# EAGLE board Stratologger sl100 Board (EAGLE 8.1.0)
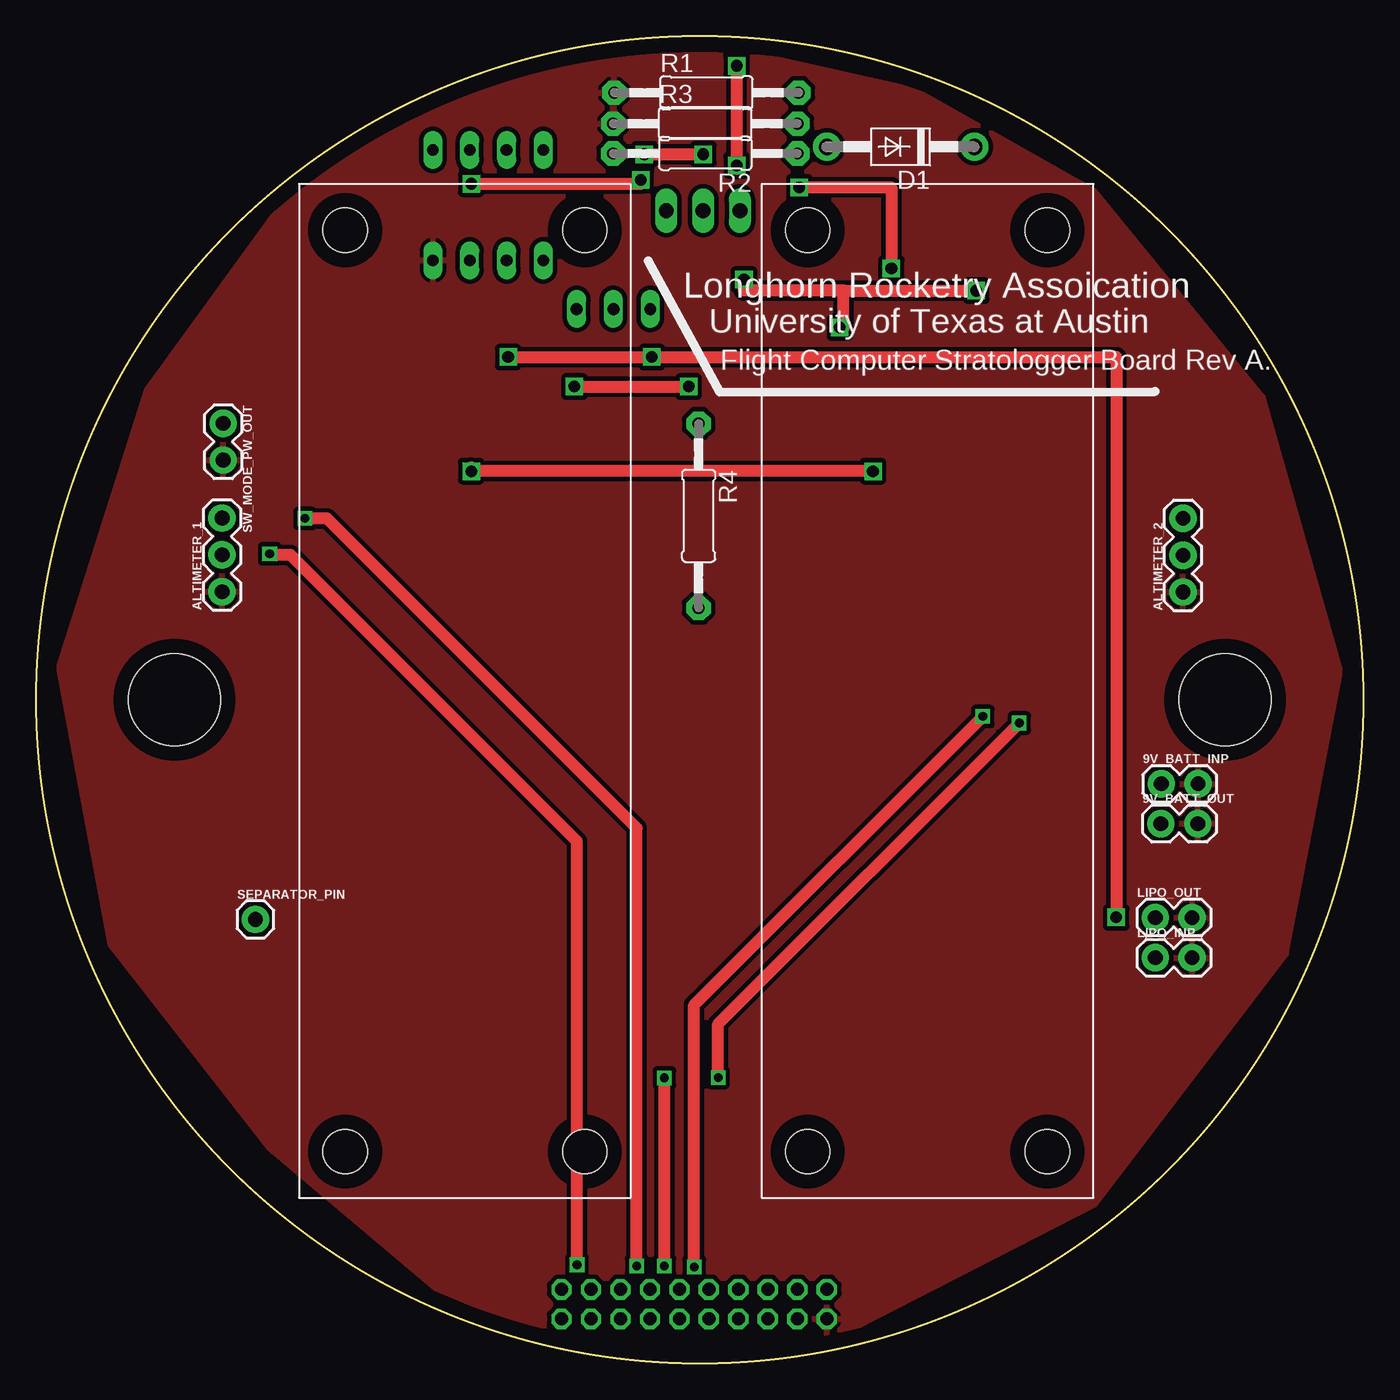
[diagram p0: board, top side]
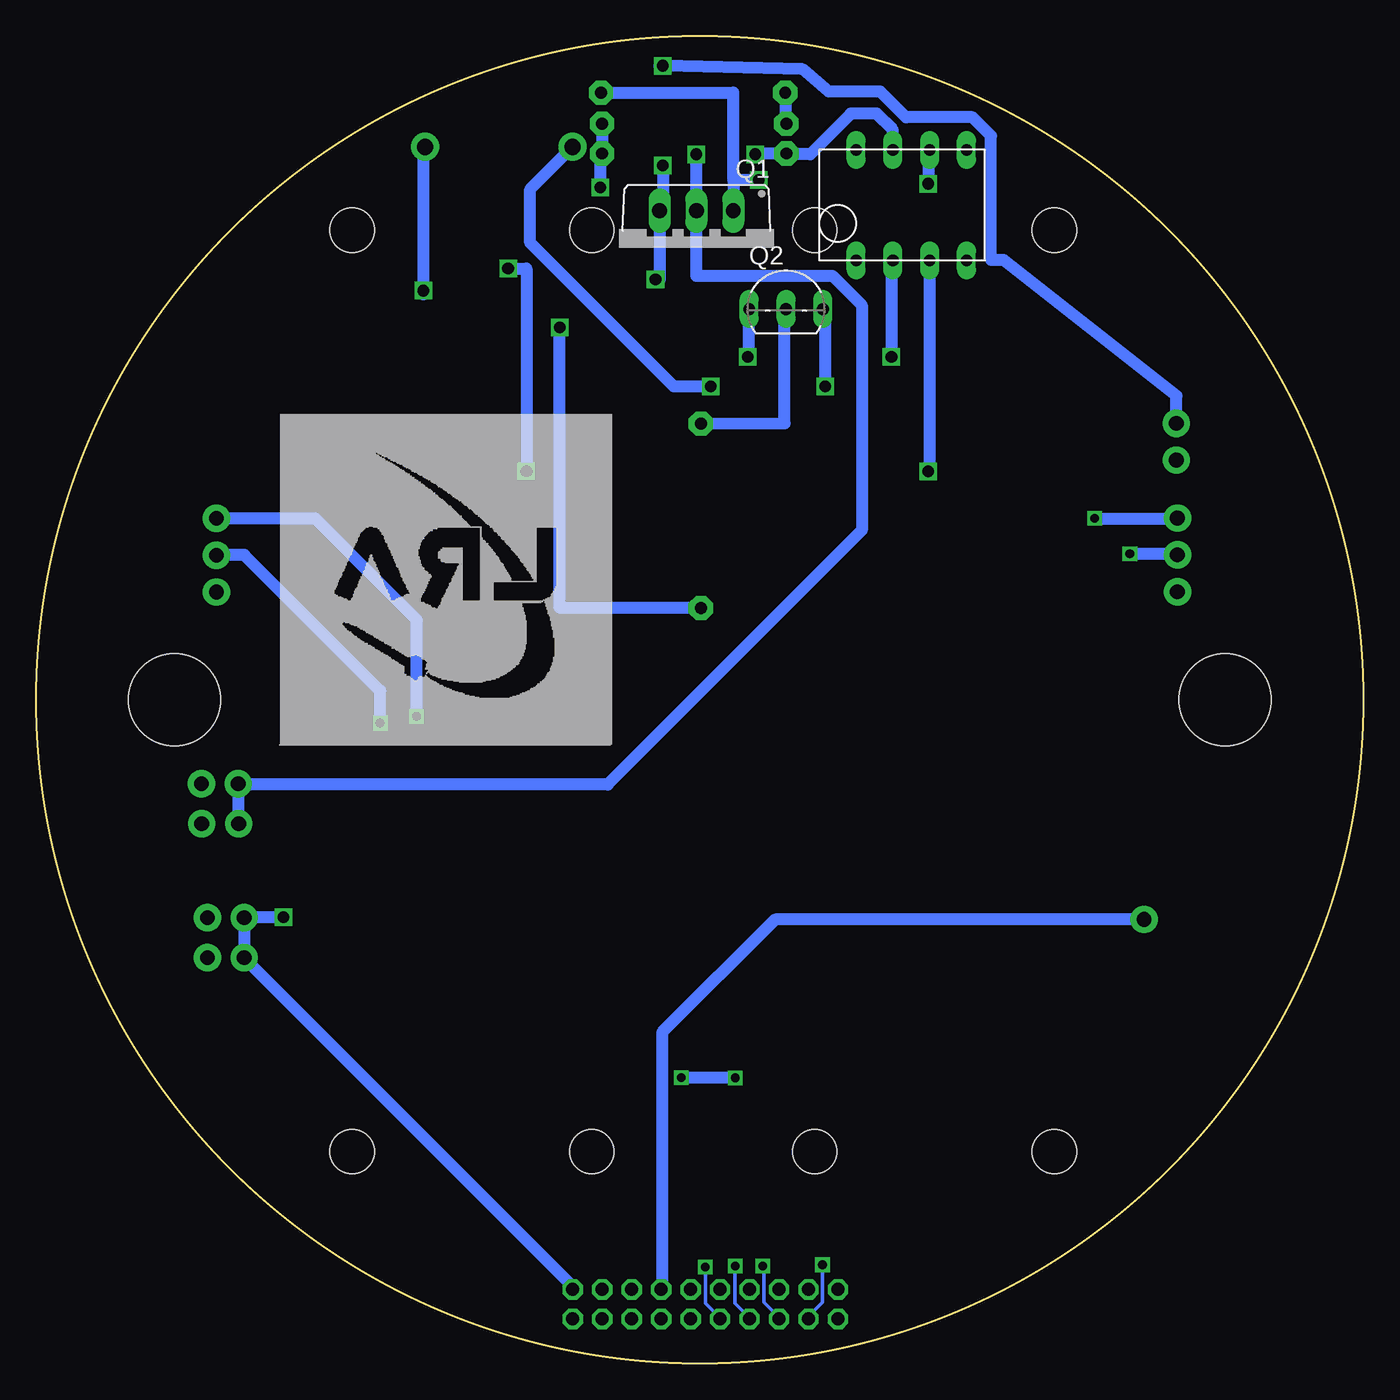
[diagram p1: board, bottom side, seen from below]

Size 91.44 x 91.44 mm. Coordinates in mm from the lower left corner, seen from the top.
Outline: circle at 45.72,45.72 radius 45.72
Copper layers (1*16): Top 0.035mm / dielectric 1.5mm / Bottom 0.035mm
Design rules "default *": minimum track width 0.15mm, minimum drill 0.35mm, track to track 12mil, track to pad 6mil, pad to pad 6mil, via to via 6mil, smd to smd 6mil, copper to edge 40mil, drill to drill 6mil, minimum pad ring 10mil, minimum via ring 8mil, stop-mask expansion 4mil, vias tented up to drill 0mil, thermal gap 10mil
Holes 6.35 mm at 9.53,45.72 81.92,45.72

## Footprints (pad centres in the part's own frame; a part is rotated, then mirrored left to right if it is on the bottom)
1X02 = drill 1.016 pad 1.88: 1 0,0; 2 2.54,0
1X03 = drill 1.016 pad 1.88: 1 0,0; 2 2.54,0; 3 5.08,0
DO41-10 = drill 1.118 pad 1.93: A 5.08,0; C -5.08,0
TO220BV = drill 1.016 long: D 0,-2.54; G -2.54,-2.54; S 2.54,-2.54
TO92-EBC-OVAL = drill 0.813 long: B 0,-1.27; C 2.54,-1.27; E -2.54,-1.27
0207/12 = drill 0.813 pad 1.676 octagon: 1 -6.35,0; 2 6.35,0
1X01 = drill 1.016 pad 1.88: 1 0,0
LM741 = drill 0.8 long: LN+ 0,2.54; LN- 0,5.08; NC 7.62,7.62; OFFSET1 0,7.62; OFFSET2 7.62,0; OUT 7.62,2.54; VCC+ 7.62,5.08; VCC- 0,0
STRATOLOGGER = hole 3.048: -3.175,3.175; -3.175,19.685; -66.675,19.685; -66.675,3.175
SMALLHEADERPACKAGE = drill 0.9 octagon: P$1 0,0; P$2 0,2.032; P$3 0,4.064; P$4 0,6.096; P$5 0,8.128; P$6 2.032,0; P$7 2.032,2.032; P$8 2.032,4.064; P$9 2.032,6.096; P$10 2.032,8.128; P$11 2.032,10.16; P$12 0,10.16; P$13 0,12.192; P$14 2.032,12.192; P$15 0,14.224; P$16 2.032,14.224; P$17 2.032,16.256; P$18 0,16.256; P$19 0,18.288; P$20 2.032,18.288

## Placement (x,y rotation side)
9V_BATT_INP  [1X02]  77.52,39.93 0 top
9V_BATT_OUT  [1X02]  77.5,37.19 0 top
ALTIMETER_1  [1X03]  12.8,53.16 90 top
ALTIMETER_2  [1X03]  79.02,53.14 90 top
D1  1N4004  [DO41-10]  59.56,83.82 180 top
LIPO_INP  [1X02]  77.11,27.94 0 top
LIPO_OUT  [1X02]  77.11,30.71 0 top
Q1  BUZ11BV  [TO220BV]  45.95,76.89 180 bottom
Q2  2N2907  [TO92-EBC-OVAL]  39.78,73.91 0 bottom
R1  10k  [0207/12]  46.18,87.55 0 top
R2  100  [0207/12]  46.1,83.36 180 top
R3  125  [0207/12]  46.1,85.42 0 top
R4  1k  [0207/12]  45.64,58.39 270 top
SEPARATOR_PIN  [1X01]  15.1,30.58 0 top
SW_MODE_PW_OUT  [1X02]  12.88,64.77 270 top
U$1  LM471  [LM741]  27.33,76 90 bottom
U$2  STRATOLOGGER  [STRATOLOGGER]  18.11,11.4 270 top
U$3  SMALLHEADERPACKAGE  [SMALLHEADERPACKAGE]  36.2,5.08 270 top
U$4  STRATOLOGGER  [STRATOLOGGER]  49.99,11.4 270 top

## Library data of the parts
9V_BATT_INP 9V_BATT_OUT ALTIMETER_1 ALTIMETER_2 LIPO_INP LIPO_OUT SEPARATOR_PIN SW_MODE_PW_OUT = SparkFun-Connectors
D1 Q2 R1-R4 = adafruit
Q1 = transistor-power
U$1 = LM741
U$2 U$4 = LRA_FlightCPU_Components
U$3 = LRA_FlightCPU_Connector

## Nets
5V_DIV: R2.1 R3.2 U$1.LN+
9V: 9V_BATT_INP.1 9V_BATT_OUT.1 Q1.D R2.2 U$1.VCC+
D1: SEPARATOR_PIN.1 U$3.P$13
GND: 9V_BATT_INP.2 9V_BATT_OUT.2 ALTIMETER_1.1 ALTIMETER_2.1 LIPO_INP.2 LIPO_OUT.2 R1.1 R3.1 SW_MODE_PW_OUT.2 U$1.VCC- U$3.P$20
LIPO_BATT: LIPO_INP.1 LIPO_OUT.1 Q2.E U$1.LN- U$3.P$19
N$1: Q2.B R4.1
N$2: D1.A Q2.C
N$5: Q1.G R1.2 U$1.OUT
N$7: D1.C Q1.S R4.2 SW_MODE_PW_OUT.1
RX1: ALTIMETER_1.2 U$3.P$7
RX2: ALTIMETER_2.2 U$3.P$9
TX1: ALTIMETER_1.3 U$3.P$8
TX2: ALTIMETER_2.3 U$3.P$10

## Tracks (layer width: path | path; a pad name or v marks a point on that pad's centre or on a via)
5V_DIV  (via drill 0.8)
  Top 0.813: v52.58,81.03 58.93,81.03 v58.93,75.44 | v57.66,61.47 v29.97,61.47 | v29.97,61.47 29.97,61.72 v29.97,61.47
  Bottom 0.813: R3.2 R2.1 52.58,83.36 v52.58,81.03 | v58.93,75.44 57.66,75.44 v57.66,61.47 | v29.97,61.47 29.87,61.47 U$1.LN+
9V  (via drill 0.8)
  Top 0.813: v41.91,83.31 v45.97,83.31
  Bottom 0.813: U$1.VCC+ 32.41,84.99 33.53,86.11 35.31,86.11 38.1,83.31 39.7,83.31 R2.2 41.6,83.36 41.66,83.31 v41.91,83.31 | v45.97,83.31 45.97,79.45 Q1.D 45.97,79.43 45.97,74.93 36.58,74.93 34.54,72.9 34.54,57.4 52.07,39.88 77.47,39.88 9V_BATT_INP.1 77.52,37.21 9V_BATT_OUT.1
D1
  Bottom 0.813: SEPARATOR_PIN.1 40.51,30.58 48.31,22.78 48.31,5.16 U$3.P$13
GND
  Bottom 0.813: R1.1 39.83,85.5 R3.1
  pour Top: 45.47,1.27 55.12,1.78 72.9,10.92 86.11,28.19 89.87,47.7 84.53,66.55 72.9,80.77 60.66,87.68 46.23,90.93 30.99,88.65 17.78,81.03 7.62,67.06 1.55,47.96 5.11,28.85 16.05,14.86 27.48,5.21 36.32,1.52
LIPO_BATT  (via drill 0.8)
  Top 0.813: v32.51,69.34 v42.42,69.34 74.42,69.34 v74.42,30.73
  Bottom 0.813: U$3.P$19 54.48,5.31 LIPO_INP.1 LIPO_OUT.1 77.11,30.73 v74.42,30.73 | U$1.LN- 32.51,76 v32.51,69.34 | v42.42,69.34 42.32,69.34 Q2.E
N$1
  Bottom 0.813: R4.1 45.24,64.75 39.88,64.77 39.88,72.54 Q2.B
N$2  (via drill 0.8)
  Top 0.813: v37.08,67.31 v44.96,67.31
  Bottom 0.813: Q2.C 37.08,72.64 v37.08,67.31 | v44.96,67.31 47.5,67.31 57.4,77.22 57.4,80.9 D1.A
N$5  (via drill 0.8)
  Top 0.813: v29.97,81.28 41.66,81.28 v41.66,81.53
  Bottom 0.813: R1.2 43.41,87.55 43.41,81.53 | 43.41,81.53 Q1.G | U$1.OUT 29.97,83.62 v29.97,81.28 | v41.66,81.53 43.41,81.53
N$7  (via drill 0.8)
  Top 0.813: 55.63,73.91 v64.77,73.91 | 55.63,73.91 48.77,73.91 v48.77,74.68 | v55.37,71.37 55.63,71.37 55.63,73.91 | v48.26,89.41 v48.26,82.55 48.26,82.3
  Bottom 0.813: SW_MODE_PW_OUT.1 12.88,66.67 24.77,76.02 25.65,76.02 25.65,84.58 26.92,85.85 31.5,85.85 33.27,87.63 36.83,87.63 38.61,89.15 v48.26,89.41 48.51,89.41 | D1.C 64.77,83.82 v64.77,73.91 64.77,73.66 | v48.77,74.68 48.49,74.68 Q1.S 48.26,79.65 v48.26,82.55 | R4.2 55.37,52.05 v55.37,71.37
RX1  (via drill 0.6)
  Top 0.813: v16.08,55.78 16.15,55.7 17.53,55.7 37.26,35.97 v37.26,6.78
  Bottom 0.254: U$3.P$7 38.23,3.23 37.26,4.19 v37.26,6.78
  Bottom 0.813: v16.08,55.78 12.88,55.78 ALTIMETER_1.2
RX2  (via drill 0.6)
  Top 0.813: v43.28,6.71 v43.28,19.66 | v46.99,19.68 46.99,23.37 v67.74,44.12
  Bottom 0.254: U$3.P$9 42.29,3.12 43.28,4.12 v43.28,6.71
  Bottom 0.813: v67.74,44.12 67.74,46.33 77.11,55.7 78.99,55.7 ALTIMETER_2.2 | v43.28,19.66 46.99,19.66 v46.99,19.68
TX1  (via drill 0.6)
  Top 0.813: v41.38,6.71 41.38,36.88 20.04,58.22 v18.52,58.22 | 12.83,58.22 ALTIMETER_1.3
  Bottom 0.254: U$3.P$8 40.26,3.15 41.3,4.19 41.3,6.63 v41.38,6.71
  Bottom 0.813: v18.52,58.22 12.83,58.22 ALTIMETER_1.3
TX2  (via drill 0.6)
  Top 0.813: v45.34,6.63 45.34,24.69 v65.23,44.58
  Bottom 0.254: U$3.P$10 44.32,3.1 45.34,4.12 v45.34,6.63
  Bottom 0.813: v65.23,44.58 65.23,51.21 72.24,58.22 ALTIMETER_2.3

## Text on the board
tPlace: Longhorn Rocketry Assoication | University of Texas at Austin | Flight Computer Stratologger Board Rev A.